# Altium PCB BRAKE PCB PROFILE (Left) V2.PcbDoc
Units mil, origin at the board's own origin, x right, y up, seen from the top; angles counter-clockwise.
Board outline 7818.87 x 3566.84 mil, 2 copper layers (Top Layer, Bottom Layer); 79 components, 80 nets, 288 pads, 37 vias.
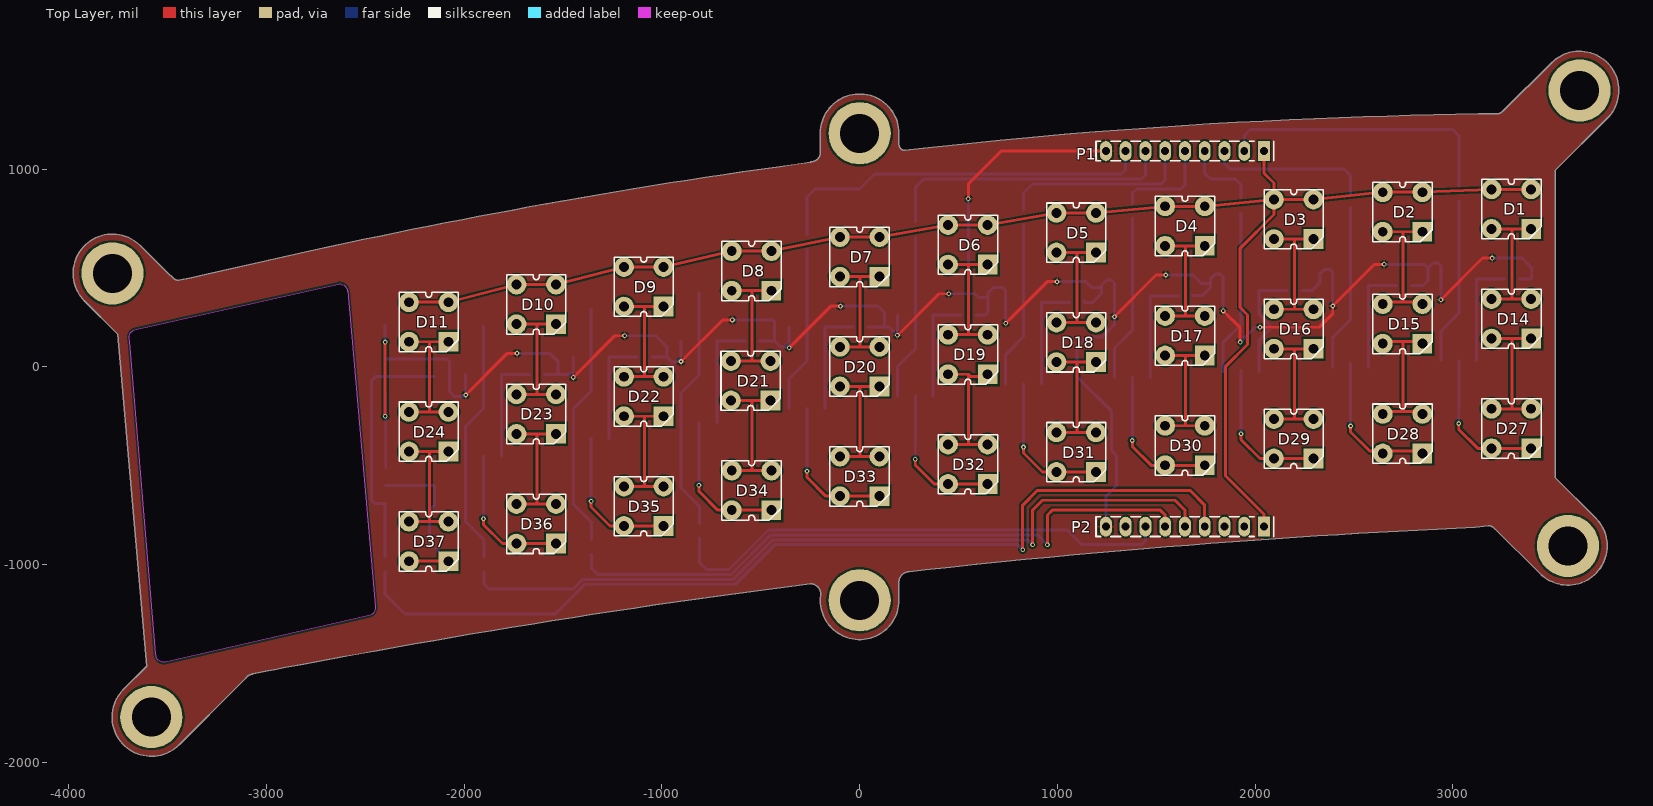
[diagram p0: Top Layer view]
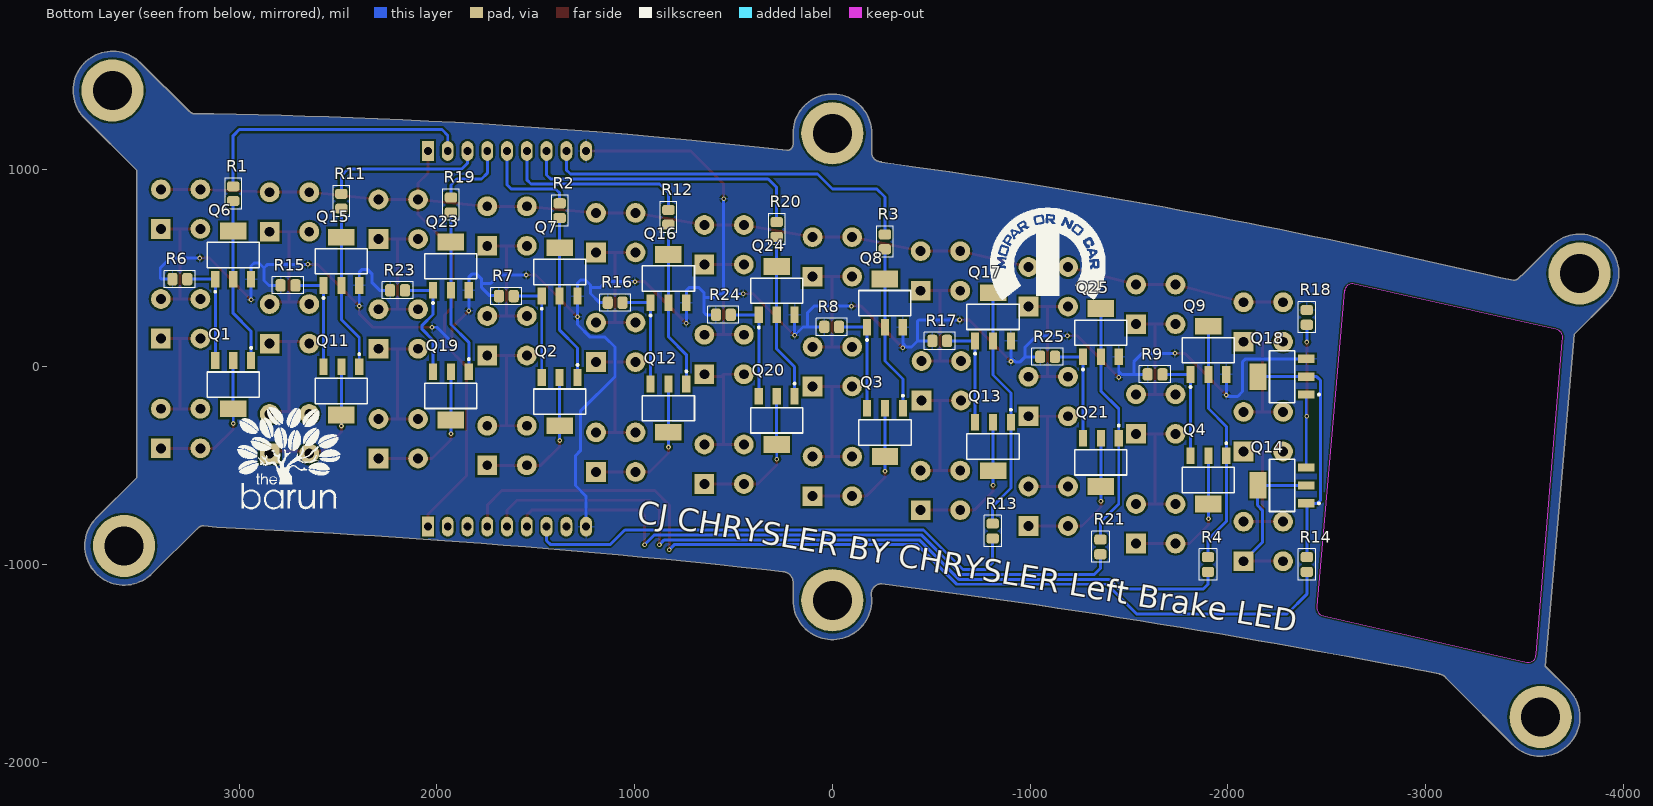
[diagram p1: Bottom Layer view, seen from below]
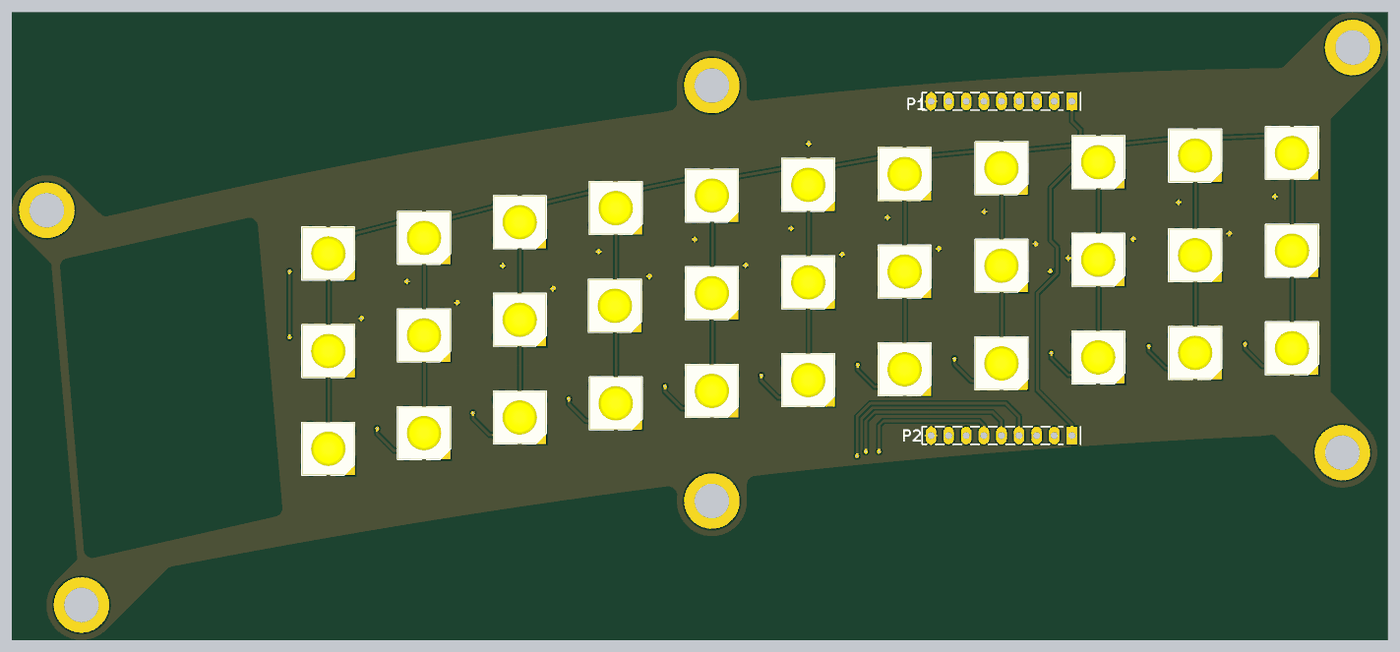
[diagram p2: 3D render of the assembled board from above, using the file's embedded part models]
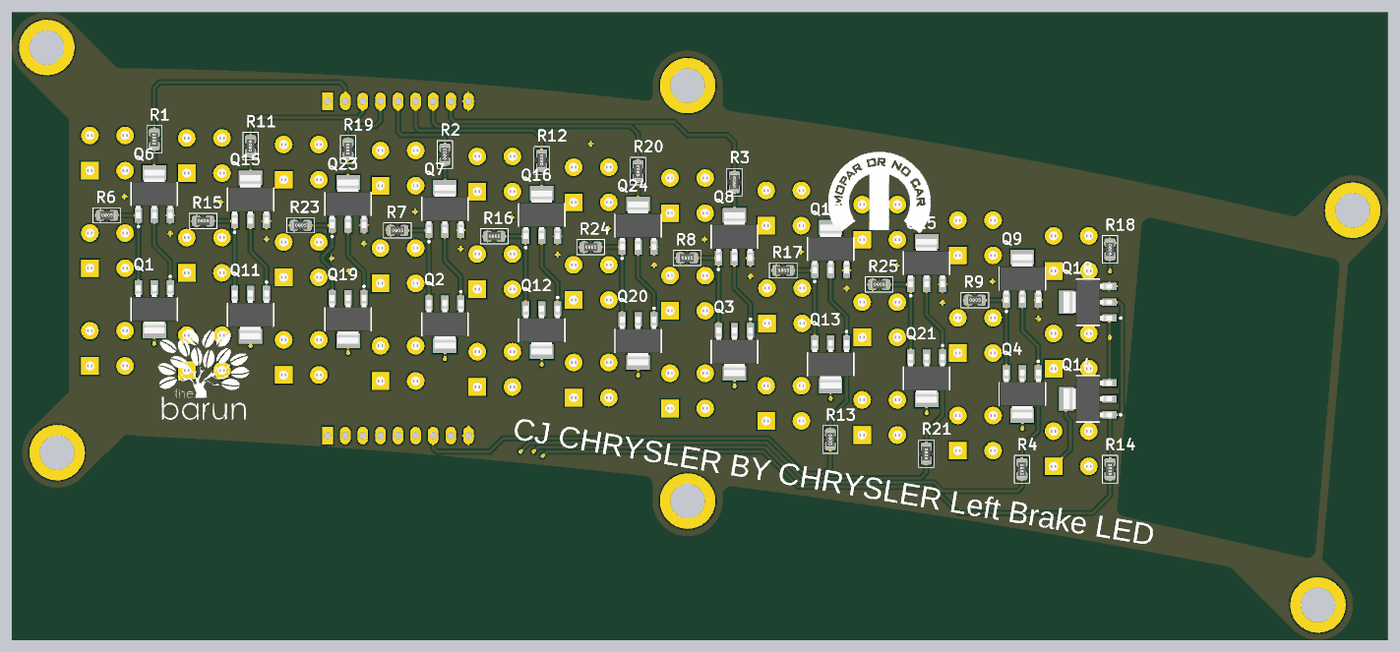
[diagram p3: 3D render of the assembled board from below, using the file's embedded part models]

## Layer stack, top to bottom
Top Solder: solder mask 0.4, Solder Resist, Dk 3.5
Top Layer: signal copper 1.4
Dielectric 1: dielectric 12.6, FR-4, Dk 4.8
Bottom Layer: signal copper 1.4
Bottom Solder: solder mask 0.4, Solder Resist, Dk 3.5

## Board outline
421 vertices, not listed, extent -3978.32,-1970.44 3840.56,1596.4
cut-out: -3692.71,130.19 -3693.83,143.53 cw(c-3655,150) -3659.88,189.07 -3645.71,193.19 -2639.55,418.19 cw(c-2630,380) -2590.93,384.88 -2590,384.96 -2451.39,-1212.28 cw(c-2490,-1220) -2476.18,-1256.86 -2495.59,-1262.41 -3512.96,-1493.74 cw(c-3520,-1455) -3559.37,-1455

## Design rules (kind name [scope] priority, off if disabled: settings)
Clearance [All] p1: gap=10
PolygonConnect [All] p1: connectstyle=Relief reliefconductorwidth=10 reliefentries=4 polygonreliefangle="90 Angle" airgapwidth=10
RoomDefinition Indicator [InComponentClass('Indicator')] p1: confinementstyle=ConfineIn formatcopy=TRUE lockcomponents=FALSE outline -3937.01,-1968.5 3937.01,-1968.5 3937.01,1574.8 -3937.01,1574.8
RoutingVias [All] p1: holewidth=28 width=50 viastyle="Through Hole" minholewidth=12 minwidth=24 maxholewidth=28 maxwidth=50
SolderMaskExpansion [All] p1: expansion=4
Width [All] p1: maxlimit=100 minlimit=10 preferedwidth=10
30 further rules are at their usual default settings.

## Components (designator, comment, footprint, x,y, rotation, side; value= is the part's Value field where it differs from the comment)
D1 "AMBER" "CREE P4 YELLOW"#1 3296.96,797.72 r180 top
D2 "AMBER" "CREE P4 YELLOW"#1 2746.38,783.2 r180 top
D3 "AMBER" "CREE P4 YELLOW"#1 2195.81,746.09 r180 top
D4 "AMBER" "CREE P4 YELLOW"#1 1645.69,711.95 r180 top
D5 "AMBER" "CREE P4 YELLOW"#1 1095.52,678.52 r180 top
D6 "AMBER" "CREE P4 YELLOW"#1 547.76,617.2 r180 top
D7 "AMBER" "CREE P4 YELLOW"#1 0,555.88 r180 top
D8 "AMBER" "CREE P4 YELLOW"#1 -546.6,484.95 r180 top
D9 "AMBER" "CREE P4 YELLOW"#1 -1091.91,404.73 r180 top
D10 "AMBER" "CREE P4 YELLOW"#1 -1635.86,315.72 r180 top
D11 "AMBER" "CREE P4 YELLOW"#1 -2179.8,226.71 r180 top
D14 "AMBER" "CREE P4 YELLOW"#1 3296.96,242.84 r180 top
D15 "AMBER" "CREE P4 YELLOW"#1 2746.38,217.02 r180 top
D16 "AMBER" "CREE P4 YELLOW"#1 2195.81,191.21 r180 top
D17 "AMBER" "CREE P4 YELLOW"#1 1645.69,157.06 r180 top
D18 "AMBER" "CREE P4 YELLOW"#1 1095.52,123.64 r180 top
D19 "AMBER" "CREE P4 YELLOW"#1 547.76,62.32 r180 top
D20 "AMBER" "CREE P4 YELLOW"#1 0,1 r180 top
D21 "AMBER" "CREE P4 YELLOW"#1 -551.18,-70.61 r180 top
D22 "AMBER" "CREE P4 YELLOW"#1 -1091.91,-150.16 r180 top
D23 "AMBER" "CREE P4 YELLOW"#1 -1635.86,-239.16 r180 top
D24 "AMBER" "CREE P4 YELLOW"#1 -2179.8,-328.17 r180 top
D27 "AMBER" "CREE P4 YELLOW"#1 3296.96,-312.43 r180 top
D28 "AMBER" "CREE P4 YELLOW"#1 2746.38,-338.24 r180 top
D29 "AMBER" "CREE P4 YELLOW"#1 2195.81,-364.05 r180 top
D30 "AMBER" "CREE P4 YELLOW"#1 1645.69,-398.2 r180 top
D31 "AMBER" "CREE P4 YELLOW"#1 1095.52,-431.62 r180 top
D32 "AMBER" "CREE P4 YELLOW"#1 547.76,-492.94 r180 top
D33 "AMBER" "CREE P4 YELLOW"#1 0,-554.27 r180 top
D34 "AMBER" "CREE P4 YELLOW"#1 -546.6,-625.2 r180 top
D35 "AMBER" "CREE P4 YELLOW"#2 -1091.91,-805.42 r180 top
D36 "AMBER" "CREE P4 YELLOW"#1 -1635.86,-794.43 r180 top
D37 "AMBER" "CREE P4 YELLOW"#1 -2179.8,-883.43 r180 top
P1 "Header 9" "HEADER 1x9" 1645.69,1091.58 r180 top
P2 "Header 9" "HEADER 1x9" 1645.69,-808.42 r180 top
Q1 "BCP56" SOT223 3030.86,-90.38 r0 bottom
Q2 "BCP56" SOT223 1379.59,-176.15 r0 bottom
Q3 "BCP56" SOT223 -266.1,-332.22 r0 bottom
Q4 "BCP56" SOT223 -1901.96,-572.38 r0 bottom
Q6 "BCP56" SOT223 3030.86,565.48 r180 bottom
Q7 "BCP56" SOT223 1379.58,479.71 r180 bottom
Q8 "BCP56" SOT223 -265.55,322.05 r180 bottom
Q9 "BCP56" SOT223 -1901.96,83.48 r180 bottom
Q11 "BCP56" SOT223 2483.9,-122.05 r0 bottom
Q12 "BCP56" SOT223 829.42,-209.58 r0 bottom
Q13 "BCP56" SOT223 -812.7,-403.15 r0 bottom
Q14 "BCP56" SOT223 -2275,-600 r90 bottom
Q15 "BCP56" SOT223 2483.9,533.81 r180 bottom
Q16 "BCP56" SOT223 829.42,446.29 r180 bottom
Q17 "BCP56" SOT223 -812.7,252.71 r180 bottom
Q18 "BCP56" SOT223 -2275,-50 r90 bottom
Q19 "BCP56" SOT223 1929.71,-147.05 r0 bottom
Q20 "BCP56" SOT223 281.66,-270.9 r0 bottom
Q21 "BCP56" SOT223 -1358.01,-483.37 r0 bottom
Q23 "BCP56" SOT223 1929.71,508.81 r180 bottom
Q24 "BCP56" SOT223 281.66,384.97 r180 bottom
Q25 "BCP56" SOT223 -1358.01,172.49 r180 bottom
R1 "1k" "RESISTOR 0805" 3030.86,875.48 r90 bottom
R2 "1k" "RESISTOR 0805" 1379.58,789.71 r90 bottom
R3 "1k" "RESISTOR 0805" -265.55,632.05 r90 bottom
R4 "1k" "RESISTOR 0805" -1900,-1000 r270 bottom
R6 "8R2" "RESISTOR 0805" 3300.56,443.43 r180 bottom
R7 "8R2" "RESISTOR 0805" 1649.28,357.66 r180 bottom
R8 "8R2" "RESISTOR 0805" 3.6,201.6 r180 bottom
R9 "8R2" "RESISTOR 0805" -1632.26,-38.57 r180 bottom
R11 "1k" "RESISTOR 0805" 2483.9,837.4 r90 bottom
R12 "1k" "RESISTOR 0805" 829.42,756.29 r90 bottom
R13 "1k" "RESISTOR 0805" -810.74,-830.77 r270 bottom
R14 "1k" "RESISTOR 0805" -2400,-1000 r270 bottom
R15 "8R2" "RESISTOR 0805" 2753.6,411.77 r180 bottom
R16 "8R2" "RESISTOR 0805" 1099.12,324.24 r180 bottom
R17 "8R2" "RESISTOR 0805" -543,130.66 r180 bottom
R18 "8R2" "RESISTOR 0805" -2400,250 r270 bottom
R19 "1k" "RESISTOR 0805" 1929.71,818.81 r90 bottom
R20 "1k" "RESISTOR 0805" 281.66,694.97 r90 bottom
R21 "1k" "RESISTOR 0805" -1356.05,-910.99 r270 bottom
R23 "8R2" "RESISTOR 0805" 2199.41,386.77 r180 bottom
R24 "8R2" "RESISTOR 0805" 551.36,262.92 r180 bottom
R25 "8R2" "RESISTOR 0805" -1088.31,50.44 r180 bottom

## Footprints (in the part's own frame and the unit in brackets; to place one, negate y for a bottom-side part, rotate by r counter-clockwise, add the part's x,y. Pads: shape width x height; smd on the part's side, far side on the other; paste and mask are expansions set on the pad)
"CREE P4 YELLOW"#1 [mil] "CREE P4 YELLOW"
  rect 100x100 hole 50: 1(-100,100)
  round 100 hole 50: 2(-100,-100) 3(100,-100) 4(100,100)
  silkscreen extent -150,-150 150,150, body extent -150,-150 150,150, height 272
"CREE P4 YELLOW"#2 [mil] "CREE P4 YELLOW"
  rect 100x100 hole 50: 1(-100,0)
  round 100 hole 50: 2(-100,-200) 3(100,-200) 4(100,0)
  silkscreen extent -150,-250 150,50, body extent -150,-250 150,50, height 272
"HEADER 1x9" [mil]
  rect 60x100 hole 40: 1(-400,0)
  oval 60x100 hole 40: 2(-300,0) 3(-200,0) 4(-100,0) 5(0,0) 6(100,0) 7(200,0) 8(300,0) 9(400,0)
  silkscreen extent -450,-50 450,50
"RESISTOR 0805" [mm]
  rrect50% 1.3x1.6 smd: 1(-0.95,0) 2(0.95,0)
  silkscreen extent -2,-1.1 2,1.1, body extent -1.25,-0.62 1.25,0.62, height 0.8
SOT223 [mm] "SOT-223/SC-73; 4 Leads; Body 6.7 x 7.3 mm, inc. leads (LxW max)"
  rect 1.05x2.15 smd: 1(-2.3,-3.1) 2(0,-3.1) 3(2.3,-3.1)
  rect 3.4x2.15 smd: 2(0,3.1)
  silkscreen extent -3.35,-4.85 3.35,1.62, body extent -3.25,-3.5 3.25,3.5, height 1.67

## Part data
D1 D2 D3 D4 D5 D6 D7 D8 D9 D10 D11 D14 D15 D16 D17 D18 D19 D20 D21 D22 D23 D24 D27 D28 D29 D30 D31 D32 D33 D34 D35 D36 D37: library part CP41B-AFSCM0Q0264, "CREE AMBER LED P4 (SUPERFLUX)"
P1 P2: "Header, 9-Pin"
Q1 Q2 Q3 Q4 Q6 Q7 Q8 Q9 Q11 Q12 Q13 Q14 Q15 Q16 Q17 Q18 Q19 Q20 Q21 Q23 Q24 Q25: library part NPN, "BCP56 80 V, 1 A NPN medium power transistors"
R1 R2 R3 R4 R6 R7 R8 R9 R11 R12 R13 R14 R15 R16 R17 R18 R19 R20 R21 R23 R24 R25: library part Res2, "Resistor"

## Free pads (board coordinates)
  round 314.96 hole 196.85 unplated: MOUNT(-3779.53,472.44) MOUNT(-3582.68,-1771.65) MOUNT(0,-1181.1) MOUNT(0,1181.1) MOUNT(3582.99,-905.93) MOUNT(3641.73,1397.64)

## Via types
v1: diameter 24, hole 12, Top Layer to Bottom Layer, 37 vias

## Nets (pads, with @x,y where several pads share a name; then routed paths per layer and width w, separated by ;. In a path a pad name is that pad's centre, name@x,y a point inside that pad or via, vN(x,y) a via of type N, cw(c..) or ccw(c..) an arc to the next point about the centre after c; other vN are vias at no path point)
DRIVE_0: P1.2 R1.2 | length 1445.5
  Bottom Layer w15: P1.2 1945.69,1170.69 1975,1200 3000,1200 3030.86,1169.14 R1.2
DRIVE_1: P1.3 R11.2 | length 818
  Bottom Layer w15: P1.3 1845.69,1029.31 1875,1000 2450,1000 2483.9,966.1 R11.2
DRIVE_2: P1.4 R19.2 | length 384.8
  Bottom Layer w15: P1.4 1745.69,979.31 1775,950 1900,950 1929.71,920.29 R19.2
DRIVE_3: P1.5 R2.2 | length 506.5
  Bottom Layer w15: R2.2 1379.58,879.58 1400,900 1625,900 1645.69,920.69 P1.5
DRIVE_4: P1.6 R12.2 | length 975.3
  Bottom Layer w15: R12.2 829.42,879.42 875,925 1525,925 1545.69,945.69 P1.6
DRIVE_5: P1.7 R20.2 | length 1485.7
  Bottom Layer w15: R20.2 281.66,906.66 325,950 1425,950 1445.69,970.69 P1.7
DRIVE_6: P1.8 R3.2 | length 1953.6
  Bottom Layer w15: R3.2 -265.55,859.45 -225,900 0,900 75,975 1325,975 1345.69,995.69 P1.8
DRIVE_7: P2.7 R13.2 | length 2585.7
  Bottom Layer w15: R13.2 -810.74,-989.26 -775,-1025 -660.36,-1025 -460.36,-825 1050,-825 1125,-900 1425,-900 1445.69,-879.31 P2.7
DRIVE_8: P2.6 R21.2 | length 3317.8
  Top Layer w15: v1(950,-900) 950,-750 975,-725 1520.69,-725 1545.69,-750 P2.6
  Bottom Layer w15: R21.2 -1356.05,-1018.95 -1325,-1050 -650,-1050 -450,-850 900,-850 v1(950,-900)
DRIVE_9: P2.5 R4.2 | length 4032.4
  Top Layer w15: v1(875,-900) 875,-725 925,-675 1595.69,-675 1645.69,-725 P2.5
  Bottom Layer w15: R4.2 -1900,-1100 -1875,-1125 -1450,-1125 -1400,-1075 -639.64,-1075 -439.64,-875 850,-875 v1(875,-900)
DRIVE_10: P2.4 R14.2 | length 4850.6
  Top Layer w15: v1(825,-925) 825,-700 900,-625 1670.69,-625 1745.69,-700 P2.4
  Bottom Layer w15: R14.2 -2400,-1150 -2300,-1250 -1539.64,-1250 -1389.64,-1100 -629.29,-1100 -429.29,-900 800,-900 v1(825,-925)
DRIVE_11: P2.3
DRIVE_12: P2.2
GND: P1.9 P2.9 Q6.3 Q7.3 Q8.3 Q9.3 Q15.3 Q16.3 Q17.3 Q18.3 Q23.3 Q24.3 Q25.3 R6.1 R7.1 R8.1 R9.1 R15.1 R16.1 R17.1 R18.1 R23.1 R24.1 R25.1 | length 12993.8
  Top Layer w15: v1(-1992.51,-142.51) -1782,68 v1(-1732.82,68) ; v1(-1448.56,-53.5) -1238.05,157 v1(-1188.87,157) ; v1(-903.25,26.72) -692.74,237.22 v1(-643.56,237.22) ; v1(-356.1,96.06) -145.6,306.57 v1(-96.41,306.57) ; v1(191.11,158.98) 401.61,369.48 v1(450.8,369.48) ; v1(550,850) 550,925 716.58,1091.58 P1.9 ; v1(738.87,220.3) 949.37,430.8 v1(998.56,430.8) ; v1(1289.03,253.72) 1499.54,464.23 v1(1548.73,464.23) ; v1(1839.16,282.83) 1925,196.98 v1(1925,125) ; v1(2025,200) 2325,200 2393.35,268.35 v1(2393.35,307.83) 2603.85,518.33 v1(2653.04,518.33) ; v1(2940.31,339.49) 3150.82,550 v1(3200,550)
  Bottom Layer w15: Q18.3 -2090.55,40.55 -2075,25 -2075,-125 -2050,-150 -2000,-150 v1(-1992.51,-142.51) Q9.3 ; v1(-1732.82,68) -1568,68 -1525,25 -1525,-38.57 ; R9.1 -1525,-38.57 ; v1(-1448.56,-53.5) Q25.3 -1448.56,-23.56 -1463.57,-38.57 -1525,-38.57 ; v1(-1188.87,157) -1032,157 -975.44,100.44 -975.44,50.44 ; R25.1 -975.44,50.44 ; v1(-903.25,26.72) Q17.3 -903.25,46.75 -925,25 -950,25 -975.44,50.44 ; v1(-643.56,237.22) -437.22,237.22 -430.66,230.66 -430.66,130.66 ; R17.1 -430.66,130.66 ; v1(-356.1,96.06) Q8.3 -356.1,118.9 -375,100 -400,100 -430.66,130.66 ; v1(-96.41,306.57) 93.43,306.57 125,275 125,201.6 ; R8.1 125,201.6 ; Q24.3 v1(191.11,158.98) 191.02,158.98 148.4,201.6 125,201.6 ; v1(450.8,369.48) 550,369.48 ; v1(550,850) 550,369.48 ; R24.1 637.92,262.92 650,275 650,350 ; v1(738.87,220.3) Q16.3 738.87,386.13 725,400 675,400 650,375 650,350 ; v1(998.56,430.8) 1144.2,430.8 1175,400 1223.73,400 ; R16.1@1132.49,332.66 R16.1@1136.52,332.66 ; R16.1 1177.07,324.24 1223.73,370.89 1223.73,400 ; P2.9 1245.69,-654.31 1300,-600 1300,-450 1275,-425 1275,-225 1100,-50 1100,100 1150,150 1225,150 1289.03,214.03 v1(1289.03,253.72) Q7.3 1289.03,423.92 1273.73,439.23 1248.73,439.23 1223.73,414.23 1223.73,400 ; v1(1548.73,464.23) 1685.77,464.23 1728.33,421.67 1773.85,421.67 ; R7.1@1682.62,361.77 1735.61,361.77 1773.85,400 1773.85,421.67 ; v1(1839.16,282.83) Q23.3 1839.16,453.02 1823.85,468.33 1798.85,468.33 1773.85,443.33 1773.85,421.67 ; v1(1925,125) 2000,200 v1(2025,200) ; R23.1 2289.81,386.77 2328.04,425 2328.04,468.33 2353.04,493.33 2378.04,493.33 2393.35,478.02 Q15.3 v1(2393.35,307.83) ; v1(2653.04,518.33) 2856.67,518.33 2875,500 ; R15.1 2850,411.77 2875,436.77 2875,500 ; v1(2940.31,339.49) Q6.3 2940.31,509.69 2925,525 2900,525 2875,500 ; v1(3200,550) 3350,550 3400,500 3400,450 3393.43,443.43 R6.1 ; 550,369.48 580.52,369.48 600,350 650,350
NetD1_1: D1.1 D1.4 D14.2 D14.3 | length 754.9
  Top Layer w15: D14.3 3300,342.84 ; D1.4 3300,697.72 ; D14.2 3300,342.84 ; D1.1 3300,697.72 ; 3300,342.84 3300,697.72
NetD2_1: D2.1 D2.4 D15.2 D15.3 | length 754.9
  Top Layer w15: D15.3@2646.38,328.32 2749.42,328.32 ; D2.4 2749.42,683.2 ; D15.2@2846.38,328.32 2749.42,328.32 ; D2.1 2749.42,683.2 ; 2749.42,328.32 2749.42,683.2
NetD3_1: D3.1 D3.4 D16.2 D16.3 | length 754.9
  Top Layer w15: D16.3 2198.85,291.21 ; D3.4 2198.85,646.09 ; D16.2 2198.85,291.21 ; D3.1 2198.85,646.09 ; 2198.85,291.21 2198.85,646.09
NetD4_1: D4.1 D4.4 D17.2 D17.3 | length 754.9
  Top Layer w15: D17.3 1648.73,257.06 ; D4.4 1648.73,611.95 ; D17.2 1648.73,257.06 ; D4.1 1648.73,611.95 ; 1648.73,257.06 1648.73,611.95
NetD5_1: D5.1 D5.4 D18.2 D18.3 | length 754.9
  Top Layer w15: D18.3 1098.56,223.64 ; D5.4 1098.56,578.52 ; D18.2 1098.56,223.64 ; D5.1 1098.56,578.52 ; 1098.56,223.64 1098.56,578.52
NetD6_1: D6.1 D6.4 D19.2 D19.3 | length 754.9
  Top Layer w15: D19.3 550.8,162.32 ; D6.4 550.8,517.2 ; D19.2 550.8,162.32 ; D6.1 550.8,517.2 ; 550.8,162.32 550.8,517.2
NetD7_1: D7.1 D7.4 D20.2 D20.3 | length 754.9
  Top Layer w15: D20.3 3.04,101 ; D7.4 3.04,455.88 ; D20.2 3.04,101 ; D7.1 3.04,455.88 ; 3.04,101 3.04,455.88
NetD8_1: D8.1 D8.4 D21.2 D21.3 | length 754.9
  Top Layer w15: D21.3@-646.6,30.06 -543.56,30.06 ; D8.4 -543.56,384.95 ; D21.2@-446.6,30.06 -543.56,30.06 ; D8.1 -543.56,384.95 ; -543.56,30.06 -543.56,384.95
NetD9_1: D9.1 D9.4 D22.2 D22.3 | length 754.9
  Top Layer w15: D22.3 -1088.87,-50.16 ; D9.4 -1088.87,304.73 ; D22.2 -1088.87,-50.16 ; D9.1 -1088.87,304.73 ; -1088.87,-50.16 -1088.87,304.73
NetD10_1: D10.1 D10.4 D23.2 D23.3 | length 754.9
  Top Layer w15: D23.3 -1632.82,-139.16 ; D10.4 -1632.82,215.72 ; D23.2 -1632.82,-139.16 ; D10.1 -1632.82,215.72 ; -1632.82,-139.16 -1632.82,215.72
NetD11_1: D11.1 D11.4 D24.2 D24.3 | length 754.9
  Top Layer w15: D24.3 -2176.76,-228.17 ; D11.4 -2176.76,126.71 ; D24.2 -2176.76,-228.17 ; D11.1 -2176.76,126.71 ; -2176.76,-228.17 -2176.76,126.71
NetD12_1: 
NetD13_1: 
NetD14_1: D14.1 D14.4 D27.2 D27.3 | length 755.3
  Top Layer w15: D27.3 3300,-212.43 ; D14.4 3300,142.84 ; D27.2 3300,-212.43 ; D14.1 3300,142.84 ; 3300,-212.43 3300,142.84
NetD15_1: D15.1 D15.4 D28.2 D28.3 | length 755.3
  Top Layer w15: D28.3@2646.38,-226.95 2749.42,-226.95 ; D15.4@2646.38,128.32 2749.42,128.32 ; D28.2@2846.38,-226.95 2749.42,-226.95 ; D15.1@2846.38,128.32 2749.42,128.32 ; 2749.42,-226.95 2749.42,128.32
NetD16_1: D16.1 D16.4 D29.2 D29.3 | length 755.3
  Top Layer w15: D29.3 2198.85,-264.05 ; D16.4 2198.85,91.21 ; D29.2 2198.85,-264.05 ; D16.1 2198.85,91.21 ; 2198.85,-264.05 2198.85,91.21
NetD17_1: D17.1 D17.4 D30.2 D30.3 | length 755.3
  Top Layer w15: D30.3 1648.73,-298.2 ; D17.4 1648.73,57.06 ; D30.2 1648.73,-298.2 ; D17.1 1648.73,57.06 ; 1648.73,-298.2 1648.73,57.06
NetD18_1: D18.1 D18.4 D31.2 D31.3 | length 755.3
  Top Layer w15: D31.3 1098.56,-331.62 ; D18.4 1098.56,23.64 ; D31.2 1098.56,-331.62 ; D18.1 1098.56,23.64 ; 1098.56,-331.62 1098.56,23.64
NetD19_1: D19.1 D19.4 D32.2 D32.3 | length 765.5
  Top Layer w15: D32.3 550.8,-392.94 ; D19.4 550.8,-37.68 ; D32.2 550.8,-392.94 ; D19.1 635.44,-50 563.12,-50 550.8,-37.68 ; 550.8,-392.94 550.8,-37.68
NetD20_1: D20.1 D20.4 D33.2 D33.3 | length 755.3
  Top Layer w15: D33.3 3.04,-454.27 ; D20.4 3.04,-99 ; D33.2 3.04,-454.27 ; D20.1 3.04,-99 ; 3.04,-454.27 3.04,-99
NetD21_1: D21.1 D21.4 D34.2 D34.3 | length 755.3
  Top Layer w15: D34.3 -543.56,-525.2 ; D21.4@-646.6,-169.94 -543.56,-169.94 ; D34.2 -543.56,-525.2 ; D21.1@-446.6,-169.94 -543.56,-169.94 ; -543.56,-525.2 -543.56,-169.94
NetD22_1: D22.1 D22.4 D35.2 D35.3 | length 755.3
  Top Layer w15: D35.3 -1088.87,-605.42 ; D22.4 -1088.87,-250.16 ; D35.2 -1088.87,-605.42 ; D22.1 -1088.87,-250.16 ; -1088.87,-605.42 -1088.87,-250.16
NetD23_1: D23.1 D23.4 D36.2 D36.3 | length 755.3
  Top Layer w15: D36.3 -1632.82,-694.43 ; D23.4 -1632.82,-339.16 ; D36.2 -1632.82,-694.43 ; D23.1 -1632.82,-339.16 ; -1632.82,-694.43 -1632.82,-339.16
NetD24_1: D24.1 D24.4 D37.2 D37.3 | length 755.3
  Top Layer w15: D37.3 -2176.76,-783.43 ; D24.4 -2176.76,-428.17 ; D37.2 -2176.76,-783.43 ; D24.1 -2176.76,-428.17 ; -2176.76,-783.43 -2176.76,-428.17
NetD25_1: 
NetD26_1: 
NetQ1_1: Q1.1 Q6.2 R1.1 | length 843.9
  Bottom Layer w15: Q1.1 2940.31,180.4 3030.86,270.95 3030.86,443.43 3030.86,687.53 R1.1
NetQ1_3: Q1.3 Q6.1 R6.2 | length 553.5
  Bottom Layer w15: Q1.3 Q6.1 R6.2
NetQ2_1: Q2.1 Q7.2 R2.1 | length 843.9
  Bottom Layer w15: Q2.1 1289.03,94.63 1379.58,185.18 1379.58,357.66 1379.58,601.76 R2.1
NetQ2_3: Q2.3 Q7.1 R7.2 | length 553.5
  Bottom Layer w15: Q2.3 Q7.1 R7.2
NetQ3_1: Q3.1 Q8.2 R3.1 | length 843.9
  Bottom Layer w15: Q3.1 -356.65,-61.44 -266.1,29.11 Q8.2@-266.1,201.6 ; Q8.2@-265.55,200 -265.55,444.1 R3.1
NetQ3_3: Q3.3 Q8.1 R8.2 | length 553.5
  Bottom Layer w15: Q3.3 -175.55,201.6 R8.2
NetQ4_1: Q4.1 Q9.2 R4.1 | length 1244
  Bottom Layer w15: Q9.2@-1901.96,205.53 -1901.96,-38.57 -1901.96,-211.05 -1992.51,-301.6 Q4.1 -1992.51,-782.49 -1900,-875 R4.1
NetQ4_3: Q4.3 Q9.1 R9.2 | length 553.5
  Bottom Layer w15: Q4.3 Q9.1 R9.2
NetQ5_1: 
NetQ5_3: 
NetQ11_1: Q11.1 Q15.2 R11.1 | length 843.9
  Bottom Layer w15: Q11.1 2393.35,148.73 2483.9,239.28 2483.9,411.77 2483.9,655.86 R11.1 R11.1@2483.9,806.41
NetQ11_3: Q11.3 Q15.1 R15.2 | length 553.5
  Bottom Layer w15: Q11.3 Q15.1 R15.2
NetQ12_1: Q12.1 Q16.2 R12.1 | length 843.9
  Bottom Layer w15: Q12.1 738.87,61.21 829.42,151.76 829.42,324.24 829.42,568.33 R12.1
NetQ12_3: Q12.3 Q16.1 R16.2 | length 553.5
  Bottom Layer w15: Q12.3 Q16.1 R16.2
NetQ13_1: Q13.1 Q17.2 R13.1 | length 1244
  Bottom Layer w15: Q17.2@-812.7,374.75 -812.7,130.66 -812.7,-41.82 -903.25,-132.37 Q13.1 -903.25,-613.27 -810.74,-705.77 R13.1
NetQ13_3: Q13.3 Q17.1 R17.2 | length 553.5
  Bottom Layer w15: Q13.3 Q17.1 R17.2
NetQ14_1: Q14.1 Q18.2 R14.1 | length 1280.9
  Bottom Layer w15: R14.1 -2400,-693.5 Q14.1 -2452.99,-690.55 -2468.55,-675 -2468.55,-68.55 -2450,-50 -2397.05,-50 Q18.2@-2152.95,-50
NetQ14_3: Q14.3 Q18.1 R18.2 | length 831.5
  Top Layer w15: v1(-2400,-250) v1(-2400,125)
  Bottom Layer w15: v1(-2400,125) R18.2 ; Q14.3 Q18.1
NetQ19_1: Q19.1 Q23.2 R19.1 | length 843.9
  Bottom Layer w15: Q19.1 1839.16,123.73 1929.71,214.28 1929.71,386.77 1929.71,630.86 R19.1
NetQ19_3: Q19.3 Q23.1 R23.2 | length 598.9
  Bottom Layer w15: Q19.3 2020.26,134.9 2075,189.64 2075,210.36 2020.26,265.1 Q23.1 R23.2
NetQ20_1: Q20.1 Q24.2 R20.1 | length 843.9
  Bottom Layer w15: Q20.1 191.11,-0.11 281.66,90.44 281.66,262.92 281.66,507.01 R20.1
NetQ20_3: Q20.3 Q24.1 R24.2 | length 553.5
  Bottom Layer w15: Q20.3 Q24.1 R24.2
NetQ21_1: Q21.1 Q25.2 R21.1 | length 1244
  Bottom Layer w15: Q25.2@-1358.01,294.53 -1358.01,50.44 -1358.01,-122.04 -1448.56,-212.59 Q21.1 -1448.56,-693.49 -1356.05,-785.99 R21.1
NetQ21_3: Q21.3 Q25.1 R25.2 | length 553.5
  Bottom Layer w15: Q21.3 Q25.1 R25.2
NetQ22_1: 
NetQ22_3: 
SINK_0: D27.1 D27.4 Q1.2 | length 754.6
  Top Layer w15: v1(3030.56,-286.8) 3030.56,-316.8 3126.19,-412.43 D27.1
  Bottom Layer w15: v1(3030.56,-286.8) 3030.56,-212.73 3030.86,-212.43 Q1.2@3030.86,31.67
SINK_1: D28.1 D28.4 Q11.2 | length 754.6
  Top Layer w15: v1(2483.6,-299.38) 2483.6,-329.38 2579.23,-425 D28.1@2850,-425
  Bottom Layer w15: v1(2483.6,-299.38) 2483.6,-225.3 2483.9,-225 Q11.2@2483.9,19.1
SINK_2: D29.1 D29.4 Q19.2 | length 754.6
  Top Layer w15: v1(1929.41,-338.43) 1929.41,-368.43 2025.03,-464.05 D29.1
  Bottom Layer w15: v1(1929.41,-338.43) 1929.41,-264.35 1929.71,-264.05 Q19.2@1929.71,-19.96
SINK_3: D30.1 D30.4 Q2.2 | length 754.6
  Top Layer w15: v1(1379.29,-372.58) 1379.29,-402.58 1474.91,-498.2 D30.1
  Bottom Layer w15: v1(1379.29,-372.58) 1379.29,-298.5 1379.59,-298.2 Q2.2@1379.59,-54.11
SINK_4: D31.1 D31.4 Q12.2 | length 754.6
  Top Layer w15: v1(829.12,-406) 829.12,-436 924.74,-531.62 D31.1
  Bottom Layer w15: v1(829.12,-406) 829.12,-331.92 829.42,-331.62 Q12.2@829.42,-87.53
SINK_5: D32.1 D32.4 Q20.2 | length 754.6
  Top Layer w15: v1(281.36,-467.32) 281.36,-497.32 376.98,-592.94 D32.1
  Bottom Layer w15: v1(281.36,-467.32) 281.36,-393.24 281.66,-392.94 Q20.2@281.66,-148.85
SINK_6: D33.1 D33.4 Q3.2 | length 754.6
  Top Layer w15: v1(-266.4,-528.64) -266.4,-558.64 -170.77,-654.27 D33.1
  Bottom Layer w15: v1(-266.4,-528.64) -266.4,-454.56 -266.1,-454.27 Q3.2@-266.1,-210.17
SINK_7: D34.1 D34.4 Q13.2 | length 754.6
  Top Layer w15: v1(-812.99,-599.58) -812.99,-629.58 -717.37,-725.2 D34.1
  Bottom Layer w15: v1(-812.99,-599.58) -812.99,-525.5 -812.7,-525.2 Q13.2@-812.7,-281.11
SINK_8: D35.1 D35.4 Q21.2 | length 754.6
  Top Layer w15: v1(-1358.31,-679.8) -1358.31,-709.8 -1262.68,-805.42 D35.1
  Bottom Layer w15: v1(-1358.31,-679.8) -1358.31,-605.72 -1358.01,-605.42 Q21.2@-1358.01,-361.33
SINK_9: D36.1 D36.4 Q4.2 | length 754.6
  Top Layer w15: v1(-1902.25,-768.81) -1902.25,-798.81 -1806.63,-894.43 D36.1
  Bottom Layer w15: v1(-1902.25,-768.81) -1902.25,-694.73 -1901.96,-694.43 Q4.2@-1901.96,-450.33
SINK_10: D37.1 D37.4 Q14.2 | length 878.5
  Top Layer w15: D37.4 D37.1
  Bottom Layer w15: Q14.2@-2397.05,-600 -2152.95,-600 -2150,-602.95 -2150,-700 -2175,-725 -2175,-888.24 D37.1
SINK_11: 
SINK_12: 
V+: D1.2 D1.3 D2.2 D2.3 D3.2 D3.3 D4.2 D4.3 D5.2 D5.3 D6.2 D6.3 D7.2 D7.3 D8.2 D8.3 D9.2 D9.3 D10.2 D10.3 D11.2 D11.3 P1.1 P2.1 | length 7866.7
  Top Layer w15: D11.3 D11.2 D10.3 D10.2 D9.3 D9.2 D8.3 D8.2 D7.3 D7.2 D6.3 D6.2 D5.3 D5.2 D4.3 D4.2 D3.3 ; P2.1 2045.69,-745.69 1850,-550 1850,0 1962.5,112.5 1962.5,262.5 1925,300 1925,600 2095.81,770.81 D3.3 ; P1.1 2045.69,979.31 2095.81,929.19 D3.3 ; D1.2 D1.3 D2.2 D2.3 D3.2 D3.3
pads on no net: P2.8

## Polygon pours and split planes (outlines as drawn)
GND on Top Layer "TOP GND" (solid, remove dead copper, pour order 0): 421 vertices, not listed, extent -3978.32,-1970.44 3840.56,1596.4
GND on Bottom Layer "BOTTOM GND" (solid, remove dead copper, pour order 1): 421 vertices, not listed, extent -3978.32,-1970.44 3840.56,1596.4

## Silkscreen, mask and mechanical layers (free items; w line width, h text height)
Bottom Overlay:
  drawing of 48 lines, arcs and shapes, not listed
  text "CJ CHRYSLER BY CHRYSLER Left Brake LED" at 1000,-825 h196.85 r9.5
Mechanical 1:
  drawing of 162 lines, arcs and shapes, not listed
Mechanical 2:
  drawing of 1279 lines, arcs and shapes, not listed
Mechanical 13:
  lines w10: 395.69,-808.42 2895.69,-808.42 ; 395.69,1091.58 2895.69,1091.58 ; 1545.69,141.58 1645.69,141.58 ; 1645.69,-808.42 1645.69,1091.58 ; 1645.69,29.31 1645.69,141.58 ; 1645.69,245.69 1645.69,141.58 ; 1745.69,141.58 1645.69,141.58